# Altium PCB rys_PCB.PcbDoc
Units mm, origin at the board's own origin, x right, y up, seen from the top; angles counter-clockwise.
Board outline 56.3 x 64 mm, 2 copper layers (Top Layer, Bottom Layer); 61 components, 55 nets, 277 pads, 97 vias.
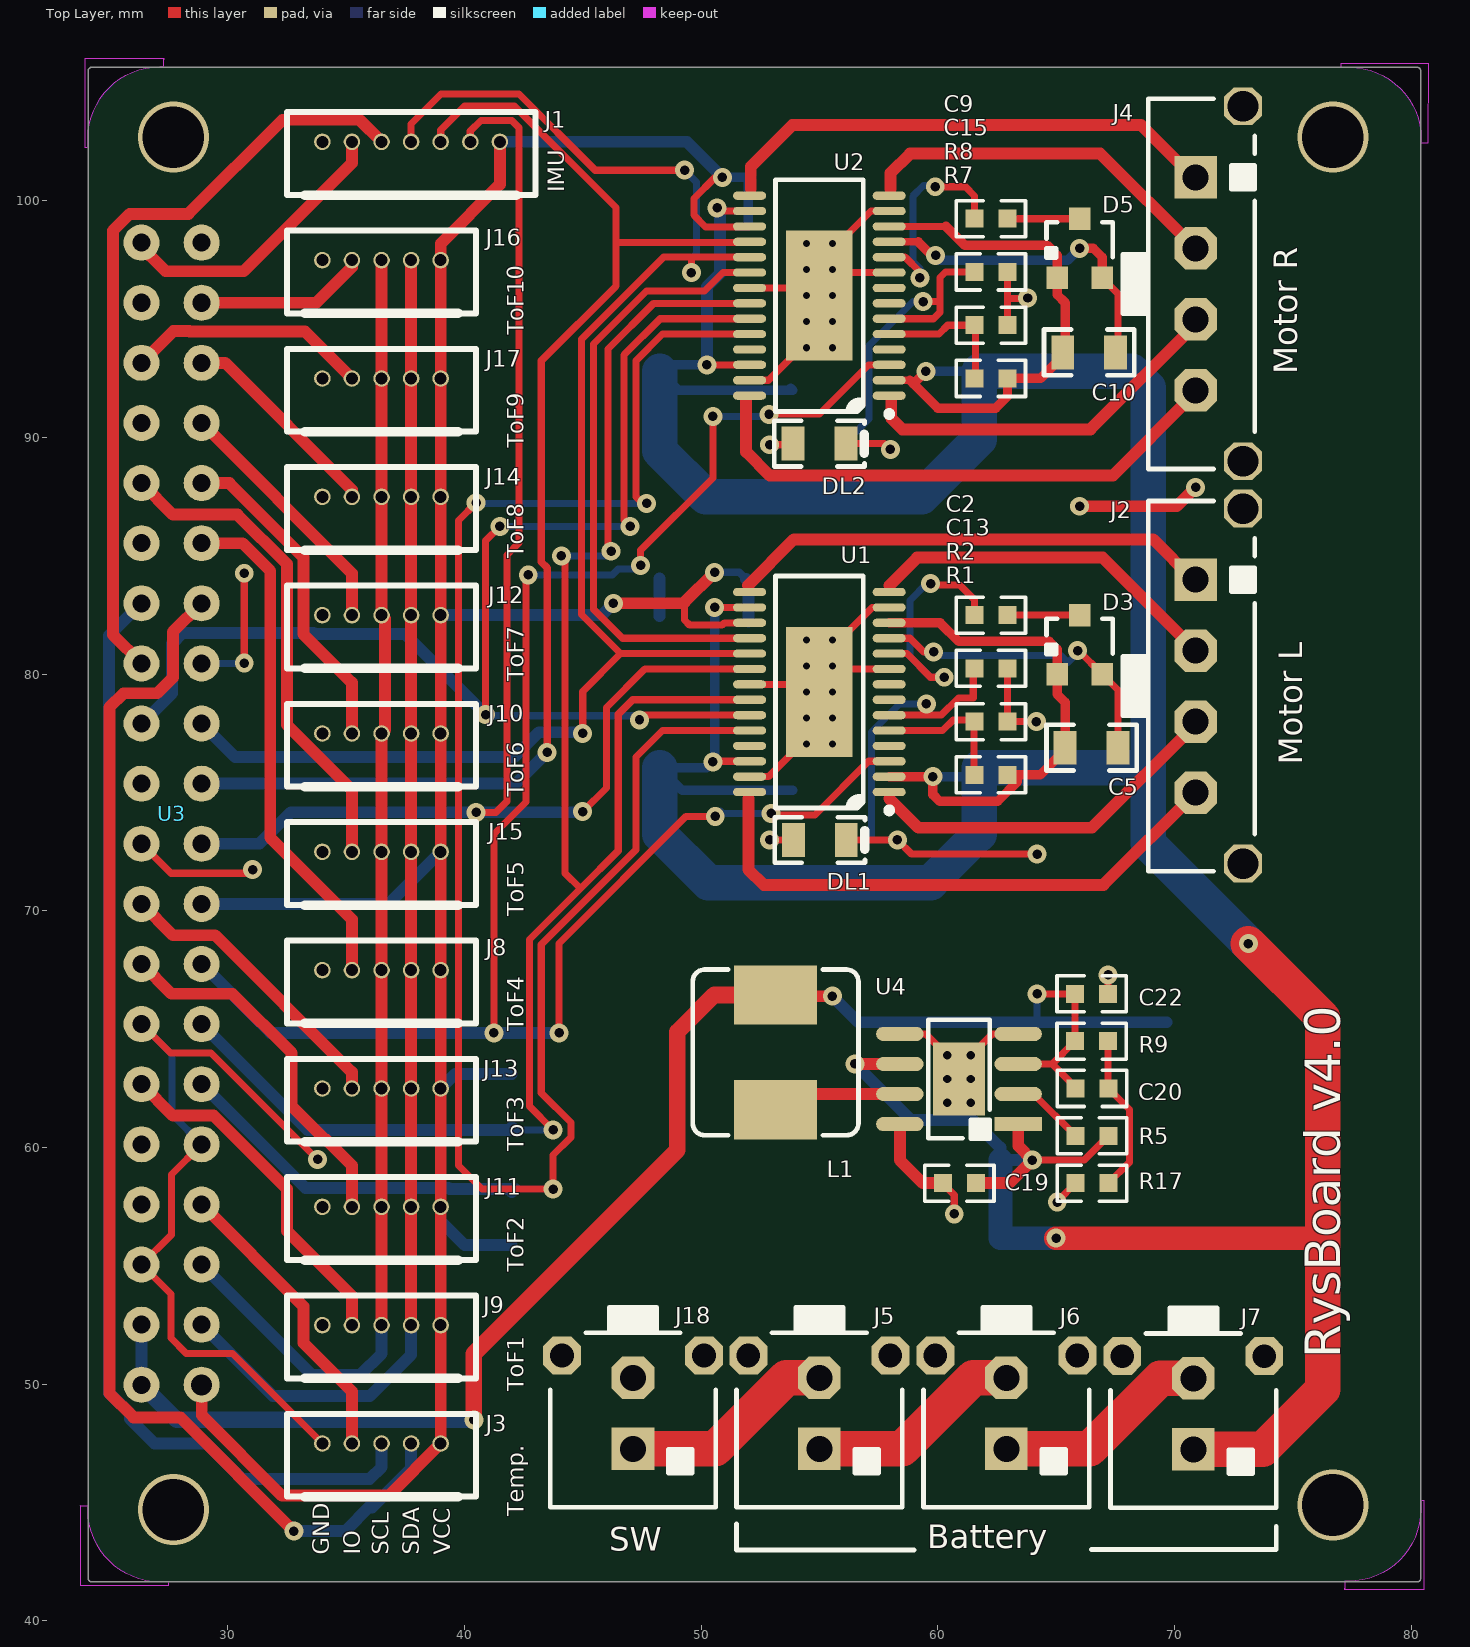
[diagram p0: Top Layer view]
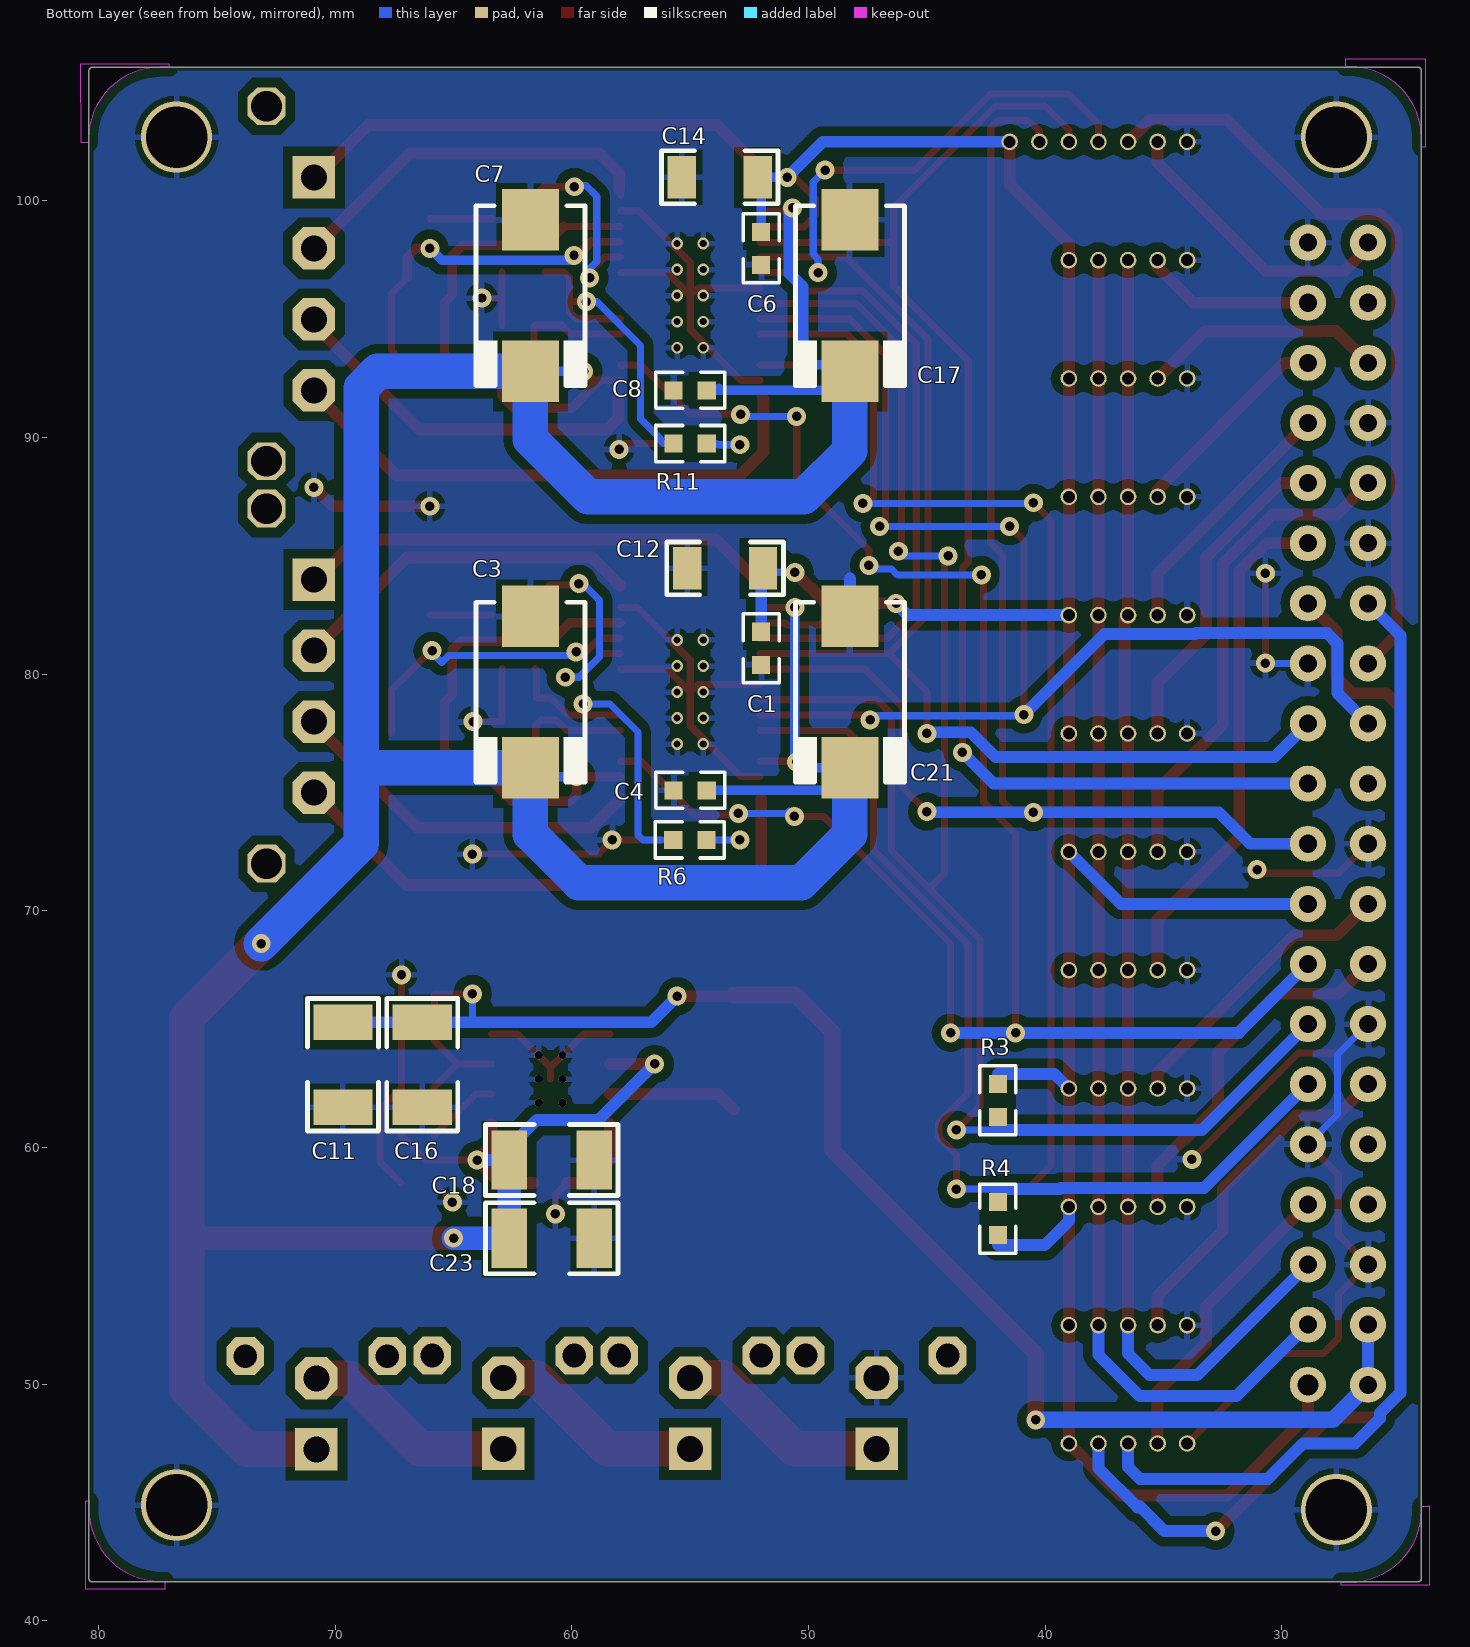
[diagram p1: Bottom Layer view, seen from below]

## Layer stack, top to bottom
Top Solder: solder mask 0.0102, Solder Resist, Dk 3.5
Top Layer: signal copper 0.0356
Dielectric 1: dielectric 0.32, FR-4, Dk 4.8
Bottom Layer: signal copper 0.0356
Bottom Solder: solder mask 0.0102, Solder Resist, Dk 3.5

## Board outline
24.257,41.65 cw(c24.257,41.8) 24.107,41.8 24.107,105.5 cw(c24.257,105.5) 24.257,105.65 80.257,105.65 cw(c80.257,105.5) 80.407,105.5 80.407,41.8 cw(c80.257,41.8) 80.228,41.652 80.229,41.652 cw(c80.2,41.8) 80.2,41.65
cut-out: 77.2,41.675 77.2,41.375 cw(c77.175,41.375) 77.175,41.35 80.55,41.35 80.55,45.075 80.4,45.075 80.4,44.7 cw(c77.375,44.7) 77.375,41.675
cut-out: 24.1,44.85 23.8,44.85 cw(c23.8,44.875) 23.775,44.875 23.775,41.5 27.5,41.5 27.5,41.65 27.125,41.65 cw(c27.125,44.675) 24.1,44.675
cut-out: 27.3,105.675 27.3,105.975 cw(c27.325,105.975) 27.325,106 23.95,106 23.95,102.275 24.1,102.275 24.1,102.65 cw(c27.125,102.65) 27.125,105.675
cut-out: 80.425,102.45 80.725,102.45 80.75,105.8 77.025,105.8 77.025,105.65 77.4,105.65 cw(c77.4,102.625) 80.425,102.625
cut-out: 80.4,105.65

## Design rules (kind name [scope] priority, off if disabled: settings)
Clearance [All] p1: gap=0.4 ignorepadtopadclearanceinfootprint=FALSE except(0: Arc-Hole Track-Hole SMDPad-Hole THPad-Hole Via-Hole Fill-Hole Poly-Hole Region-Hole Text-Hole; 0.2: Arc-Arc Arc-Track Arc-SMDPad Arc-THPad Arc-Via Arc-Text Track-Track Track-SMDPad Track-THPad Track-Via Track-Text SMDPad-SMDPad SMDPad-THPad SMDPad-Via SMDPad-Text THPad-THPad THPad-Via THPad-Text Via-Via Via-Text)
ComponentClearance [All] p1: gap=0.2 collisioncheckmode=3 verticalgap=0.2 showdistances=FALSE
PlaneClearance [All] p1: clearance=0.8
PolygonConnect [All] p1: connectstyle=Relief reliefconductorwidth=0.254 reliefentries=4 polygonreliefangle="90 Angle" airgapwidth=0.254
RoutingCorners [All] p1: cornerstyle=45-Degree minsetback=2 maxsetback=2
RoutingVias [All] p1: holewidth=0.4 width=0.8 viastyle="Through Hole" minholewidth=0.4 minwidth=0.7 maxholewidth=1 maxwidth=5
SolderMaskExpansion [All] p1: expansion=0.05
Width [All] p1: maxlimit=2 minlimit=0.3 preferedwidth=0.5
27 further rules are at their usual default settings.

## Components (designator, comment, footprint, x,y, rotation, side; value= is the part's Value field where it differs from the comment)
C1 "100n" 0603 52,81.1 r90 bottom
C2 "10n" 0603 62.25,82.5 r180 top
C3 "47u" _C_TAN_D 61.75,79.248 r90 bottom
C4 "100n" 0603 55,75.1 r0 bottom
C5 "220n" 0805 66.5,76.9 r180 top
C6 "100n" 0603 52,98 r90 bottom
C7 "47u" _C_TAN_D 61.75,96 r90 bottom
C8 "100n" 0603 55,92 r0 bottom
C9 "10n" 0603 62.25,99.25 r180 top
C10 "220n" 0805 66.4,93.6 r180 top
C11 "10u" 1210_C 69.675,63.5 r90 bottom
C12 "10u" 1206_C 53.525,84.475 r180 bottom
C13 "100n" 0603 62.25,80.25 r0 top
C14 "10u" 1206_C 53.75,101 r180 bottom
C15 "100n" 0603 62.25,97 r0 top
C16 "10u" 1210_C 66.325,63.5 r90 bottom
C17 "47u" _C_TAN_D 48.25,96 r90 bottom
C18 "10u" 1210_C 60.85,59.475 r0 bottom
C19 "100n" 0603 60.918,58.5 r0 top
C20 "10n" 0603 66.518,62.5 r180 top
C21 "47u" _C_TAN_D 48.25,79.25 r90 bottom
C22 "100n" 0603 66.5,66.5 r180 top
C23 "10u" 1210_C 60.85,56.175 r0 bottom
D3 "BAV99" SOT-23 66,81.25 r0 top
D5 "BAV99" SOT-23 66,98 r0 top
DL1 "RED" 0805_LED 55.018,73 r180 top
DL2 "RED" 0805_LED 55,89.75 r180 top
J1 "PICO_BLADE_7" PicoBlade_THT_1x7_HEADER 36.5,102.5 r0 top
J2 "Molex Microfit" "MICROFIT 4x1 Vertical" 73.4,80 r90 top
J3 "PICO_BLADE_5" PicoBlade_THT_1x5_HEADER 36.5,47.5 r0 top
J4 "Molex Microfit" "MICROFIT 4x1 Vertical" 73.4,97 r90 top
J5 "Molex Microfit" "MICROFIT 1x2 Vertical" 55,50.275 r0 top
J6 "Molex Microfit" "MICROFIT 1x2 Vertical" 62.9,50.275 r0 top
J7 "Molex Microfit" "MICROFIT 1x2 Vertical" 70.8,50.25 r0 top
J8 "PICO_BLADE_5" PicoBlade_THT_1x5_HEADER 36.5,67.5 r0 top
J9 "PICO_BLADE_5" PicoBlade_THT_1x5_HEADER 36.5,52.5 r0 top
J10 "PICO_BLADE_5" PicoBlade_THT_1x5_HEADER 36.5,77.5 r0 top
J11 "PICO_BLADE_5" PicoBlade_THT_1x5_HEADER 36.5,57.5 r0 top
J12 "PICO_BLADE_5" PicoBlade_THT_1x5_HEADER 36.5,82.5 r0 top
J13 "PICO_BLADE_5" PicoBlade_THT_1x5_HEADER 36.5,62.5 r0 top
J14 "PICO_BLADE_5" PicoBlade_THT_1x5_HEADER 36.5,87.5 r0 top
J15 "PICO_BLADE_5" PicoBlade_THT_1x5_HEADER 36.5,72.5 r0 top
J16 "PICO_BLADE_5" PicoBlade_THT_1x5_HEADER 36.5,97.5 r0 top
J17 "PICO_BLADE_5" PicoBlade_THT_1x5_HEADER 36.5,92.5 r0 top
J18 "Molex Microfit" "MICROFIT 1x2 Vertical" 47.125,50.275 r0 top
L1 "3.3uH" L_HPI0624 53.15,64.025 r0 top
R1 "62k1%" 0603_R 62.25,75.75 r0 top
R2 "9.76k" 0603_R 62.25,78 r180 top
R3 "10k" 0603_R 42,62 r90 bottom
R4 "10k" 0603_R 42,57 r270 bottom
R5 "1k" 0603_R 66.518,60.5 r0 top
R6 "3k" 0603_R 55.018,73 r0 bottom
R7 "62k1%" 0603_R 62.25,92.5 r0 top
R8 "9.76k" 0603_R 62.25,94.75 r180 top
R9 "11k1%" 0603_R 66.5,64.5 r180 top
R11 "3k" 0603_R 55,89.75 r0 bottom
R17 "2k1%" 0603_R 66.518,58.5 r0 top
U1 "ST L6470 28Pin" "ST HTSSOP-28" 55,79.25 r180 top
U2 "ST L6470 28Pin" "ST HTSSOP-28" 55,96 r180 top
U3 "RaspberryPi_3B+" RASPBERRYPI_S 26.36,98.24 r270 top locked
U4 "ST1S10PHR" HSOP8 60.9,62.9 r180 top

## Footprints (in the part's own frame and the unit in brackets; to place one, negate y for a bottom-side part, rotate by r counter-clockwise, add the part's x,y. Pads: shape width x height; smd on the part's side, far side on the other; paste and mask are expansions set on the pad)
0603 [mil]
  rect 30x30 smd: 1(-27.5,0) 2(27.5,0)
  silkscreen extent -58,-30 58,30, body extent -31,-16 31,16, height 31
0603_R [mil]
  rect 30x30 smd: 1(-27.5,0) 2(27.5,0)
  silkscreen extent -58,-30 58,30, body extent -31,-16 31,16, height 31
0805 [mil]
  rect 38x56 smd: 1(-44,0) 2(44,0)
  silkscreen extent -75,-38 75,38, body extent -39,-25 39,25, height 39
0805_LED [mm]
  rect 0.965x1.422 smd: A(1.118,0) K(-1.118,0)
  silkscreen extent -1.91,-0.97 1.91,0.97, body extent -1,-0.63 1,0.63, height 0.9
1206_C [mm]
  rect 1.2x1.8 smd: 1(-1.6,0) 2(1.6,0)
  silkscreen extent -2.46,-1.12 2.46,1.12, body extent -1.6,-0.8 1.6,0.8, height 0.8
1210_C [mm]
  rect 1.5x2.5 smd: 1(-1.8,0) 2(1.8,0)
  silkscreen extent -2.8,-1.5 2.8,1.5, body extent -2.1,-1.25 2.1,1.25, height 2
_C_TAN_D [mm] "Capacitor, SM Tantalum; Body 7.3 x 4.3 mm (LxW typ)"
  rect 2.6x2.4 smd: N(3.2,0) P(-3.2,0)
  silkscreen extent -3.8,-2.3 3.8,2.3, body extent -3.65,-2.15 3.65,2.15, height 2.8
HSOP8 [mm] "H pad 8-Pin Small Outline Integrated Circuit 1.27 mm Pitch, IPC Medium Density"
  rect 2x0.6 smd: 1(-2.5,1.905)
  oval 2x0.6 smd: 2(-2.5,0.635) 3(-2.5,-0.635) 4(-2.5,-1.905) 5(2.5,-1.905) 6(2.5,-0.635) 7(2.5,0.635) 8(2.5,1.905)
  rect 2.2x3.1 smd: 9(0,0)
  silkscreen extent -1.3,-2.5 1.3,2.53, body extent -3.1,-2.5 3.1,2.5, height 1.75
L_HPI0624 [mm] "7.3mm x 7.3mm x 3.2mm"
  rect 3.5x2.5 smd: 1(0,2.425) 2(0,-2.425)
  silkscreen extent -3.5,-3.5 3.5,3.5, body extent -3.65,-3.65 3.65,3.65, height 3.2
"MICROFIT 1x2 Vertical" [mm] "Molex Vertical 3.00mm pitch Micro-Fit 3.0 Wire-to-Board Header 430450212"
  rect 1.8x1.8 hole 1.1: 1(0,-3)
  oct 1.8x1.8 hole 1.1: 2(0,0)
  oct 1.6x1.6 hole 1: MH(-3,0.94) MH(3,0.94)
  silkscreen extent -3.5,-5.47 3.5,2.98, body extent -3.57,-5.47 3.58,3.3, height 9.95
"MICROFIT 4x1 Vertical" [mm] "Molex Vertical 3.00mm pitch Micro-Fit 3.0 Wire-to-Board Header 436500429"
  rect 1.8x1.8 hole 1.1: 1(4,2.5)
  oct 1.8x1.8 hole 1.1: 2(1,2.5) 3(-2,2.5) 4(-5,2.5)
  oct 1.6x1.6 hole 1.3: MH(-8,0.5) MH(7,0.5)
  silkscreen extent -8.32,0 7.32,5.58, body extent -8.32,0.1 7.32,5.7, height 9.95
PicoBlade_THT_1x5_HEADER [mm]
  round 0.7 hole 0.51: 0(-2.5,0) 1(-1.25,0) 2(0,0) 3(1.25,0) 4(2.5,0)
  silkscreen extent -4,-2.25 4,1.25, body extent -4,-2.25 4,1.25, height 4.25
PicoBlade_THT_1x7_HEADER [mm]
  round 0.7 hole 0.51: 0(-2.5,0) 1(-1.25,0) 2(0,0) 3(1.25,0) 4(2.5,0) 5(3.75,0) 6(5,0)
  silkscreen extent -4,-2.25 6.5,1.25, body extent -3.95,-2.2 6.55,1.3, height 4.2
RASPBERRYPI_S [mil] "singleboard_computer_40PIN_header"
  round 60 hole 35: 1(1900,100)
  round 60 hole 30: 2(1900,0) 3(1800,100) 4(1800,0) 5(1700,100) 6(1700,0) 7(1600,100) 8(1600,0) 9(1500,100) 10(1500,0) 11(1400,100) 12(1400,0) 13(1300,100) 14(1300,0) 15(1200,100) 16(1200,0) 17(1100,100) 18(1100,0) 19(1000,100) 20(1000,0) 21(900,100) 22(900,0) 23(800,100) 24(800,0) 25(700,100) 26(700,0) 27(600,100) 28(600,0) 29(500,100) 30(500,0) 31(400,100) 32(400,0) 33(300,100) 34(300,0) 35(200,100) 36(200,0) 37(100,100) 38(100,0) 39(0,100) 40(0,0)
  body extent -1266,-71 2168,2322, height 93
SOT-23 [mm] "SOT-23; 3 Leads; Body 3.0 x 2.6 mm, inc. leads (LxW max)"
  rect 0.9x0.95 smd: 1(-0.95,-1.25) 2(0.95,-1.25) 3(0,1.25)
  silkscreen extent -1.4,-0.4 1.4,1.1, body extent -1.45,-1.25 1.45,1.25, height 1
"ST HTSSOP-28" [mm] "HTSSOP, 28-Leads, Body 9.70x4.40mm, Pitch 0.65mm, Thermal Pad 5.50x2.80mm, IPC Medium Density"
  oval 1.4x0.35 smd: 1(-2.95,4.225) 2(-2.95,3.575) 3(-2.95,2.925) 4(-2.95,2.275) 5(-2.95,1.625) 6(-2.95,0.975) 7(-2.95,0.325) 8(-2.95,-0.325) 9(-2.95,-0.975) 10(-2.95,-1.625) 11(-2.95,-2.275) 12(-2.95,-2.925) 13(-2.95,-3.575) 14(-2.95,-4.225) 15(2.95,-4.225) 16(2.95,-3.575) 17(2.95,-2.925) 18(2.95,-2.275) 19(2.95,-1.625) 20(2.95,-0.975) 21(2.95,-0.325) 22(2.95,0.325) 23(2.95,0.975) 24(2.95,1.625) 25(2.95,2.275) 26(2.95,2.925) 27(2.95,3.575) 28(2.95,4.225)
  rect 2.8x5.5 smd: 29(0,0)
  silkscreen extent -3.08,-4.9 1.85,5.12, body extent -2.25,-4.9 2.25,4.9, height 1.2

## Part data
C1 C2 C4 C5 C6 C8 C9 C10 C11 C12 C13 C14 C15 C16 C18 C19 C20 C22 C23: library part C_CER, "Ceramic Capacitor"
C3 C7 C17 C21: library part C_TAN, "Tantalum Capacitor"
D3 D5: "Charge pump diode", ComponentLink1Description=Supplier, ComponentLink1URL=https://www.tme.eu/pl/details/bav99-dio/diody-uniwersalne-smd/diotec-semiconductor/bav99/?gclid=CjwKCAjwuO3cBRAyEiwAzOxKsjEfIjBEMiuf1MfOOw41XfFBLf9W3FTm4SrcCEQFmDl5D7iYJBHTpRoCdegQAvD_BwE
DL1 DL2: library part LED1, "Light Emitting Diode"
J1: "1x7 header", URL=https://www.tme.eu/pl/details/mx-53047-0510/zlacza-sygnalowe-raster-125mm/molex/530470510/
J2 J4: library part "Microfit 1x4", Supplier=TME, Symbol="Molex 436500429", URL=https://www.tme.eu/pl/details/mx-43650-0429/zlacza-sygnalowe-raster-300mm/molex/43650-0429/
J3 J8 J9 J10 J11 J12 J13 J14 J15 J16 J17: "1x5 header", URL=https://www.tme.eu/pl/details/mx-53047-0510/zlacza-sygnalowe-raster-125mm/molex/530470510/
J5 J6 J7 J18: library part "Microfit 2x1", Supplier=TME, Symbol="Molex 430450212"
L1: library part L_IND_HPI0624-3R3, "Inductor", Supplier=TME, Symbol=HPI0624-3R3, URL=https://www.tme.eu/pl/details/hpi0624-3r3/dlawiki-smd-mocy/ferrocore/
R1 R2 R3 R4 R5 R6 R7 R8 R9 R11 R17: library part R, "Resistor"
U1 U2: "SPI stepper driver"
U4: "DC/DC converter 3A", Supplier=TME, URL=https://www.tme.eu/pl/details/st1s14phr/regulatory-napiecia-uklady-dcdc/st-microelectronics/

## Via types
v1: diameter 0.8, hole 0.4, Top Layer to Bottom Layer, tented both sides, 67 vias
v2: diameter 0.5, hole 0.3, Top Layer to Bottom Layer, 20 vias
v3: diameter 0.35, hole 0.35, Top Layer to Bottom Layer, 6 vias
v4: diameter 3, hole 2.6, Top Layer to Bottom Layer, 4 vias

## Nets (pads, with @x,y where several pads share a name; then routed paths per layer and width w, separated by ;. In a path a pad name is that pad's centre, name@x,y a point inside that pad or via, vN(x,y) a via of type N, cw(c..) or ccw(c..) an arc to the next point about the centre after c; other vN are vias at no path point)
3V3: C1.2 C6.2 C12.2 C14.2 J1.6 J3.4 J8.4 J9.4 J10.4 J11.4 J12.4 J13.4 J14.4 J15.4 J16.4 J17.4 R3.2 R4.2 U1.17 U2.17 U3.1 U3.17 | length 125.3
  Top Layer w0.3: 49.3,83.036 49.3,82.3 49.525,82.075 50.886,82.075 50.986,82.175 U1.17 ; v1(50.9,101) 50.6,101 49.7,100.1 49.7,99.4 50.195,98.905 52.03,98.905 U2.17
  Top Layer w0.5: U3.1 28.9,48.69 32.29,45.3 36.8,45.3 J3.4 J9.4 J11.4 J13.4 J8.4 J15.4 J10.4 J12.4 J14.4 J17.4 J16.4 39,98.2 41.5,100.7 J1.6 ; v1(46.3,83) 49.264,83 49.3,83.036 v1(50.575,84.311)
  Bottom Layer w0.3: v1(50.575,84.311) 51.614,84.311 C12.2@51.9,84.025
  Bottom Layer w0.4: v1(50.9,101) C14.2@51.9,101 ; 52,99.118 52,100.9 C14.2@51.9,101 ; C14.2 C14.2@51.9,101
  Bottom Layer w0.5: U3.17 36.8,70.3 J15.4 ; J11.4 39,56.9 40.018,55.882 42,55.882 ; J13.4 39.618,63.118 42,63.118 ; J12.4 45.8,82.5 v1(46.3,83) ; J1.6 49.4,102.5 v1(50.9,101) ; C12.2@51.9,84.025 52,83.925 52,82.218
5V: C11.2 C16.2 C20.2 C22.2 L1.1 R9.2 U3.2 U3.4 U4.3 | length 68
  Top Layer w0.3: U4.3 64.836,63.535 ; v1(64.2,66.5) C22.2 R9.2 64.836,63.535 ; C20.2 65.82,62.552 64.836,63.535
  Top Layer w0.5: L1.1 53.2,66.4 v1(55.55,66.4)
  Top Layer w0.7: v1(40.4,48.5) 40.4,51.3 49,59.9 49,64.897 50.553,66.45 L1.1
  Bottom Layer w0.3: 64.2,65.3 v1(64.2,66.5)
  Bottom Layer w0.5: U3.2 U3.4 ; v1(55.55,66.4) 56.65,65.3 64.2,65.3 C16.2 C11.2
  Bottom Layer w0.7: U3.2 27.84,48.5 v1(40.4,48.5)
BUSY: R3.1 U1.22 U2.22 U3.13 | length 74.2
  Top Layer w0.3: v1(43.75,60.75) 42.75,61.75 42.75,68.793 44.9,70.943 ; v1(44.1,85) 44.25,84.85 44.25,71.593 44.9,70.943 ; v1(46.2,85.2) 46.075,85.325 46.075,93.75 48,95.675 U2.22 ; U1.22 47.114,78.925 46.5,78.311 46.5,72.543 44.9,70.943
  Bottom Layer w0.3: 42.132,60.75 v1(43.75,60.75) ; v1(44.1,85) 46,85 v1(46.2,85.2)
  Bottom Layer w0.5: U3.13 33.37,60.75 42.132,60.75 42,60.882
CE0: U1.23 U2.23 U3.24 | length 57.2
  Top Layer w0.3: v1(40.9,78.3) 40.9,85.65 v1(41.5,86.25) ; v1(47,86.25) 46.75,86.5 46.75,93.5 48.275,95.025 U2.23 ; v1(47.4,78.075) 47.6,78.275 U1.23
  Bottom Layer w0.3: v1(40.9,78.3) v1@40.9,78.25 ; v1(41.5,86.25) v1(47,86.25) ; v1(47.4,78.075) 47.225,78.25 v1@40.9,78.25 ; v1@40.9,78.25 40.85,78.25 40.875,78.275 v1@40.9,78.25
  Bottom Layer w0.5: U3.24 26.37,77.92 27.65,79.2 27.65,81.3 28.1,81.75 33.619,81.75 33.669,81.7 37.5,81.7 v1(40.9,78.3)
CE1: J1.2 U3.26 | length 32.5
  Top Layer w0.5: U3.26 25.148,81.672 25.148,98.742 25.858,99.452 28.342,99.452 32.321,103.431 35.569,103.431 J1.2
FLAG: R4.1 U1.24 U2.24 U3.11 | length 94.4
  Top Layer w0.3: v1(40.5,87.25) 39.75,86.5 39.75,59.25 40.75,58.25 v1(43.75,58.25) 43.75,59.689 44.5,60.439 44.5,61.061 43.25,62.311 43.25,68.586 47.25,72.586 47.25,76.5 48.375,77.625 U1.24 ; v1(47.7,87.225) 47.525,87.225 47.25,87.5 47.25,93.25 48.375,94.375 U2.24
  Bottom Layer w0.3: v1(40.5,87.25) 40.525,87.225 v1(47.7,87.225) ; 42.132,58.25 v1(43.75,58.25)
  Bottom Layer w0.5: U3.11 33.28,58.3 39.331,58.3 39.381,58.25 42.132,58.25 42,58.118
GND: C1.1 C3.N C4.2 C6.1 C7.N C8.2 C11.1 C12.1 C13.2 C14.1 C15.2 C16.1 C17.N C18.1 C19.1 C21.N C22.1 C23.1 DL1.K DL2.K J1.0 J3.0 J8.0 J9.0 J10.0 J11.0 J12.0 J13.0 J14.0 J15.0 J16.0 J17.0 J18.2 R2.1 R8.1 R17.1 U1.9 U1.13 U1.21 U1.27 U1.29 U2.9 U2.13 U2.21 U2.27 U2.29 U3.6 U3.9 U3.14 U3.20 U3.25 U3.30 U3.34 U3.39 U4.4 U4.5 U4.8 U4.9 | length 116.6
  Top Layer w0.3: U3.14 27.58,64 29.3,64 v1(33.8,59.5) ; U3.20 27.607,71.593 30.893,71.593 v1(31.05,71.75) ; U3.9 27.62,58.86 27.62,56.32 U3.6 27.6,53.82 27.6,51.95 28.25,51.3 30.2,51.3 J3.0 ; v1(30.7,80.477) v1(30.7,84.27) ; U1.27 52.85,75.675 55,77.825 U1.29 ; U1.21 54.675,79.575 U1.29 ; U2.27 52.85,92.425 55,94.575 U2.29 ; U2.21 54.675,96.325 U2.29 ; DL2.K 57.75,89.75 v1(58,89.5) ; DL1.K v1(58.3,73) 58.9,72.4 v1(64.2,72.4) ; U1.9 55.975,80.225 U1.29 ; U1.13 57.231,82.825 55,80.594 U1.29 ; U2.9 55.975,96.975 U2.29 ; U2.13 57.175,99.575 55,97.4 U2.29 ; U4.5 59.495,64.805 v3(60.4,63.9) U4.9@60.9,63.4 ; C19.1 60.219,58.481 60.7,58 v1(60.7,57.2) ; U4.9 U4.9@60.9,63.4 ; C13.2 R2.1 v1(64.171,78) ; R8.1 62.948,95.875 ; C15.2 62.948,95.875 ; U4.4 62.305,64.805 v3(61.4,63.9) U4.9@60.9,63.4 ; v1(63.8,95.9) 63.775,95.875 62.948,95.875 ; v1(65.05,57.7) 65.05,57.73 R17.1 ; C22.1 v1(67.198,67.3)
  Top Layer w0.5: U4.8 58.4,59.475 59.375,58.5 C19.1 ; v1(66,87.1) 70.1,87.1 v1(70.9,87.9)
  Bottom Layer w0.3: U3.14 27.644,63.936 27.644,61.396 U3.9 ; U3.25 30.683,80.46 v1(30.7,80.477) ; v1@58,89.4 v1(58,89.5) ; v1@65.734,87.1 v1(66,87.1)
  Bottom Layer w0.5: C21.N 48.25,84.05
  other v2: 54.45,77.05 55.55,77.05 54.45,78.15 55.55,78.15 54.45,79.25 55.55,79.25 54.45,80.35 55.55,80.35 54.45,81.45 55.55,81.45 54.45,93.8 55.55,93.8 54.45,94.9 55.55,94.9 54.45,96 55.55,96 54.45,97.1 55.55,97.1 54.45,98.2 55.55,98.2
  other v3: 60.4,61.9 61.4,61.9 60.4,62.9 61.4,62.9
  other v4: 27.7,44.7 76.7,44.9 27.7,102.7 76.7,102.7
IRQ: J1.1 U3.40 | length 13.4
  Top Layer w0.5: J1.1 35.25,101.6 30.678,97.028 27.372,97.028 26.16,98.24 U3.40 U3.40@26.4,98.24 ; U3.40@26.4,98.24 26.4,98.132 26.7,98.132 26.592,98.24 U3.40@26.4,98.24
MISO: J1.4 U2.18 U3.21 | length 55.3
  Top Layer w0.3: J1.4 39,103 40.014,104.014 42.107,104.014 46.4,99.721 46.4,98.275 ; v1(43.5,76.7) 43.5,83.439 43.5,84.5 43.25,84.75 43.25,93.25 46.4,96.4 46.4,98.275 ; U2.18 52.025,98.25 46.425,98.25 46.4,98.275
  Bottom Layer w0.5: U3.21 42.18,75.38 v1(43.5,76.7)
MOSI: J1.5 U1.20 U3.19 | length 61.2
  Top Layer w0.3: J1.5 40.25,102.95 40.7,103.4 42,103.4 42.3,103.1 42.3,85.543 41.8,85.043 41.8,74.636 41.332,74.168 v1(40.5,74.168) ; v1(45,74.2) 46,75.2 46,78.6 47.625,80.225 U1.20
  Bottom Layer w0.5: U3.19 31.34,72.84 32.668,74.168 v1(40.5,74.168) 44.968,74.168 v1(45,74.2)
NetC2_1: C2.1 D3.3 | length 2.6
  Top Layer w0.3: 63.368,82.5 D3.3
NetC2_2: C2.2 U1.10 | length 10.9
  Top Layer w0.3: U1.10 58.7,80.875 59.7,79.875 v1(60.275,79.875) ; v1(59.703,83.829) 59.75,83.782 60.918,83.782 61.55,83.15 C2.2@61.55,82.5
  Bottom Layer w0.3: v1(59.703,83.829) 59.571,83.829 59.55,83.85 58.825,83.125 58.825,80.75 59.7,79.875 v1(60.275,79.875)
NetC9_1: C9.1 D5.3 | length 2.6
  Top Layer w0.3: 63.368,99.25 D5.3
NetC9_2: C9.2 U2.10 | length 9.3
  Top Layer w0.3: U2.10 58.625,97.625 59.25,97 v1(59.25,96.75) ; v1(59.897,100.6) 61.168,100.6 61.551,100.217 C9.2
  Bottom Layer w0.3: v1(59.25,96.75) 59.25,97.137 58.948,97.439 58.948,100.197 59.401,100.65 59.725,100.65 59.753,100.678 59.831,100.6 v1(59.897,100.6)
NetC13_1: C13.1 R6.2 U1.6 | length 13.9
  Top Layer w0.3: U1.6 59.3,78.275 ; v1(59.525,78.75) 59.525,78.5 59.3,78.275 ; C13.1 61.5,80.198 61.5,79 60.875,79 60.15,78.275 59.3,78.275
  Bottom Layer w0.3: 56.218,73 56.968,73 ; 57,73 57.2,73.2 57.2,77.558 58.392,78.75 v1(59.525,78.75)
NetC15_1: C15.1 R11.2 U2.6 | length 13.2
  Top Layer w0.3: U2.6 59.825,95.025 60.1,95.3 60.1,95.75 ; v1(59.386,95.75) 60.1,95.75 ; 61.132,97 60.329,97 60.1,96.771 60.1,95.75
  Bottom Layer w0.3: 56.118,89.75 56.25,89.882 56.25,89.95 57.1,90.8 57.1,93.9 58.95,95.75 v1(59.386,95.75)
NetC20_1: C20.1 R9.1 R17.2 | length 6.7
  Top Layer w0.3: R9.1 67.198,62.518 C20.1 68.1,61.617 68.1,59.383 R17.2
NetDL1_A: DL1.A R6.1 | length 2
  Top Layer w0.3: v1(52.9,73) DL1.A
  Bottom Layer w0.3: v1(52.9,73) 53.9,73
NetDL2_A: DL2.A R11.1 | length 2
  Top Layer w0.3: v1(52.9,89.7) 53.832,89.7 DL2.A
  Bottom Layer w0.3: v1(52.9,89.7) 53.832,89.7 53.882,89.75
NetJ2_1: J2.1 U1.15 | length 20.7
  Top Layer w0.3: 51.975,83.75 52.05,83.675 U1.15
  Top Layer w0.5: 51.975,83.75 53.925,85.7 69.1,85.7 70.8,84 J2.1
NetJ2_2: J2.2 U1.14 | length 15.1
  Top Layer w0.5: 57.95,83.75 59.129,84.929 66.971,84.929 J2.2
NetJ2_3: J2.3 U1.1 | length 15.4
  Top Layer w0.5: 57.95,74.75 59.182,73.518 66.518,73.518 J2.3@71,78
NetJ2_4: J2.4 U1.28 | length 24.1
  Top Layer w0.3: 52,74.74 52,74.975 U1.28
  Top Layer w0.5: 52,74.74 52,71.75 52.65,71.1 54.444,71.1 ; 54.444,71.1 55.356,71.1 67,71.1 J2.4
NetJ4_1: J4.1 U2.15 | length 21.7
  Top Layer w0.3: U2.15 52.05,100.45 52.1,100.5
  Top Layer w0.5: 52.1,100.5 52.1,101.45 53.855,103.205 68.595,103.205 70.8,101 J4.1
NetJ4_2: J4.2 U2.14 | length 15.9
  Top Layer w0.3: U2.14 57.95,100.45 58,100.5
  Top Layer w0.5: 58,100.5 58,101.175 58.83,102.005 66.87,102.005 70.875,98 J4.2
NetJ4_3: J4.3 U2.1 | length 16.1
  Top Layer w0.3: U2.1 U2.1@58.037,91.688
  Top Layer w0.5: U2.1@58.037,91.688 58.037,90.813 58.5,90.35 66.451,90.35 70.9,94.799 J4.3
NetJ4_4: J4.4 U2.28 | length 23.3
  Top Layer w0.3: U2.28@51.9,91.625 U2.28
  Top Layer w0.5: U2.28@51.9,91.625 51.9,89.4 52.9,88.4 67.4,88.4 70.7,91.7 J4.4@70.7,92
NetJ5_1: J5.1 J6.2 | length 9.1
  Top Layer w1.5: J5.1 58.503,47.275 61.503,50.275 J6.2
NetJ5_2: J5.2 J18.1 | length 9.1
  Top Layer w1.5: J18.1 50.603,47.275 53.603,50.275 J5.2
NetJ6_1: J6.1 J7.2 | length 9.1
  Top Layer w1.5: J6.1 66.428,47.275 69.403,50.25 J7.2
NetL1_2: L1.2 U4.7 | length 5.5
  Top Layer w0.5: L1.2 53.815,62.265 U4.7
NetR1_1: R1.1 R2.2 U1.5 | length 6
  Top Layer w0.3: U1.5 60.207,77.625 60.657,78.075 61.3,78.075 61.525,77.85 R1.1@61.525,75.75
NetR5_1: R5.1 U4.2 | length 3.2
  Top Layer w0.3: U4.2 64.055,62.265 R5.1
NetR7_1: R7.1 R8.2 U2.5 | length 6
  Top Layer w0.3: U2.5 60.05,94.375 60.425,94.75 R8.2 61.6,94.701 R7.1@61.6,92.5
OD\: J3.1 U3.7 | length 12.7
  Top Layer w0.5: U3.7 33.2,53.3 33.2,51.75 35.25,49.7 J3.1
SCL: J8.2 J9.2 J10.2 J11.2 J12.2 J13.2 J14.2 J15.2 J16.2 J17.2 U3.5 | length 56.2
  Top Layer w0.5: J9.2 J11.2 J13.2 J8.2 J15.2 J10.2 36.65,77.65 36.65,82.35 J12.2 J14.2 J17.2 J16.2
  Bottom Layer w0.5: U3.5 33.56,50.4 35.6,50.4 36.5,51.3 J9.2
SCL1: J3.2 U3.28 | length 48.3
  Bottom Layer w0.5: U3.28 26.35,83 24.991,81.641 24.991,49.635 25.858,48.768 25.858,48.542 26.9,47.5 29.1,47.5 30.6,46 36,46 36.5,46.5 J3.2
SCLK: J1.3 U1.19 U2.19 U3.23 | length 68.2
  Top Layer w0.3: J1.3 37.75,103.25 39.014,104.514 42.314,104.514 45.528,101.3 v1@48.965,101.3 ; v1(45,77.5) 45,79.275 46.6,80.875 ; v1(49.593,96.975) 49.593,97.618 49.6,97.625 ; U1.19 46.6,80.875 ; U2.19 49.6,97.625 ; 46.6,80.875 44.95,82.525 44.95,94.157 48.418,97.625 49.6,97.625
  Bottom Layer w0.3: v1(49.302,101.3) 49.8,100.802 49.8,97.755 49.595,97.55 49.593,97.55 v1(49.593,96.975)
  Bottom Layer w0.5: U3.23 30.32,76.5 42.098,76.5 43.148,77.55 44.95,77.55 v1(45,77.5)
SDA: J8.3 J9.3 J10.3 J11.3 J12.3 J13.3 J14.3 J15.3 J16.3 J17.3 U3.3 | length 57.1
  Top Layer w0.5: J9.3 J11.3 J13.3 J8.3 J15.3 J10.3 J12.3 J14.3 J17.3 J16.3
  Bottom Layer w0.5: U3.3 31.92,49.5 36,49.5 37.75,51.25 J9.3
SDA1: J3.3 U3.27 | length 53.2
  Top Layer w0.5: U3.27 27.688,81.788 27.688,79.863 27.025,79.2 25.6,79.2 25.001,78.601 25.001,49.625 26.026,48.6 28,48.6 v1(32.8,43.8)
  Bottom Layer w0.5: v1(32.8,43.8) 34.96,43.8 36.03,44.87 36.1,44.8 37.75,46.45 J3.3
SDI: U1.18 U2.20 | length 26.2
  Top Layer w0.3: U1.18 46.675,81.525 45.45,82.75 45.45,93.95 47.7,96.2 50.152,96.2 50.927,96.975 U2.20
STBY: U1.3 U2.3 U3.15 | length 78.1
  Top Layer w0.3: v1(41.25,64.848) 41.25,73.257 42.6,74.607 v1@42.6,83.925 ; v1(44,64.848) 44,68.629 49.371,74 v1(50.6,74) v1@50.7,74 ; v1(47.45,84.6) 47.45,85.25 50.5,88.3 v1(50.5,90.9) ; v1(52.872,90.984) 52.888,91 55,91 57.075,93.075 U2.3 ; v1(52.963,74.123) 52.901,74.061 54.811,74.061 57.075,76.325 U1.3
  Bottom Layer w0.3: v1(42.7,84.2) 46.249,84.2 46.499,84.45 47.3,84.45 v1(47.45,84.6) ; v1(50.5,90.9) 52.817,90.9 52.825,90.892 52.872,90.939 v1(52.872,90.984) ; v1(50.6,74) 50.825,74.225 50.927,74.123 v1(52.963,74.123)
  Bottom Layer w0.5: U3.15 31.812,64.848 v1(41.25,64.848) v1(44,64.848)
TOF0: J8.1 U3.29 | length 21.7
  Top Layer w0.5: U3.29 30.632,85.54 31.8,84.372 31.8,73.1 35.25,69.65 J8.1
TOF1: J10.1 U3.31 | length 13.9
  Top Layer w0.5: U3.31 30.072,88.08 33.2,84.952 33.2,81.7 35.25,79.65 J10.1
TOF2: J12.1 U3.33 | length 10.8
  Top Layer w0.5: U3.33 35.25,84.27 J12.1
TOF3: J14.1 U3.35 | length 8.9
  Top Layer w0.5: U3.35 29.89,93.16 35.25,87.8 J14.1
TOF4: J16.1 U3.37 | length 7.3
  Top Layer w0.5: U3.37 33.75,95.7 35.25,97.2 J16.1
TOF5: J9.1 U3.12 | length 14.9
  Top Layer w0.5: U3.12 27.688,61.352 29.402,61.352 32.5,58.254 32.5,56.483 35.25,53.733 J9.1
TOF6: J11.1 U3.16 | length 15.5
  Top Layer w0.5: U3.16 27.62,66.5 30.2,66.5 32.7,64 32.7,61.75 34.1,60.35 34.152,60.35 35.25,59.252 J11.1
TOF7: J13.1 U3.18 | length 12.5
  Top Layer w0.5: U3.18 27.688,68.972 29.468,68.972 35.25,63.19 J13.1
TOF8: J15.1 U3.32 | length 20.9
  Top Layer w0.5: U3.32 27.688,86.752 30.41,86.752 32.5,84.662 32.5,77.869 35.25,75.119 J15.1
TOF9: J17.1 U3.36 | length 10.3
  Top Layer w0.5: U3.36 27.7,94.5 28.386,94.5 28.398,94.488 33.262,94.488 J17.1
VBOOT0: C5.1 D3.2 U1.11 | length 13.2
  Top Layer w0.3: U1.11 58.825,81.525 59.4,80.95 v1@59.714,80.95 ; v1(59.825,80.95) v1@59.714,80.95 ; v1@59.91,80.754 v1@59.714,80.95 ; v1(65.908,81) 65.95,81 D3.2 67.618,79.332 C5.1@67.618,77.5
  Bottom Layer w0.3: v1(59.825,80.95) 59.825,80.972 59.999,80.798 65.202,80.798 65.5,80.5 65.908,80.908 v1(65.908,81)
VBOOT1: C10.1 D5.2 U2.11 | length 14.1
  Top Layer w0.3: U2.11 59.173,98.275 ; D5.2 67.618,96.082 67.618,93.7 C10.1
  Top Layer w0.4: 59.173,98.275 59.748,97.7 v1(59.91,97.7) ; v1(66,98) 66.575,98 66.95,97.625 D5.2
  Bottom Layer w0.4: v1(59.91,97.7) 59.91,97.538 59.948,97.5 65.5,97.5 v1(66,98)
VMOT: C3.P C4.1 C5.2 C7.P C8.1 C10.2 C17.P C18.2 C19.2 C21.P C23.2 D3.1 D5.1 J7.1 R1.2 R5.2 R7.2 U1.2 U1.12 U1.16 U1.26 U2.2 U2.12 U2.16 U2.26 U4.1 U4.6 | length 229.5
  Top Layer w0.3: v1(50.25,93.075) U2.26 ; v1@50.525,76.325 U1.26 ; v1(50.575,82.825) U1.16 ; v1@50.775,99.575 U2.16 ; U2.2 58.825,92.425 ; U2.12 60.35,98.925 ; v1(64,59.475) 66.192,59.475 R5.2
  Top Layer w0.4: v1(50.5,76.3) v1@50.525,76.325 ; v1@50.5,82.825 v1(50.575,82.825) ; v1@50.677,99.673 v1@50.775,99.575 ; U1.2 v1(59.8,75.675) 59.8,74.918 60.079,74.639 62.539,74.639 63.368,75.468 63.368,75.75 64.332,75.75 65.382,76.8 65.382,78.818 65.05,79.15 D3.1 65.05,81.05 64.711,81.389 60.886,81.389 60.1,82.175 U1.12 ; 58.825,92.425 58.975,92.275 ; v1(59.5,92.8) 58.975,92.275 ; 60.35,98.925 61.136,98.139 64.611,98.139 65.05,97.7 D5.1 65.05,96.039 65.382,95.707 65.382,93.532 64.35,92.5 R7.2 62.948,91.749 62.45,91.25 60,91.25 58.975,92.275
  Top Layer w0.5: v1@50.677,99.673 v1(50.677,99.705) ; v1@56.481,63.535 v1(56.5,63.535) U4.6 ; C19.2 63.025,58.5 v1(64,59.475) 63.4,60.075 U4.1
  Top Layer w1: v1(65,56.175) 76.1,56.175 76.275,56 ; 76.25,53.5 76.275,53.525
  Top Layer w1.5: J7.1 73.725,47.25 76.275,49.8 76.275,53.525 76.275,56 76.275,65.475 v1(73.125,68.625)
  Bottom Layer w0.4: v1(50.25,93.075) 48.525,93.075 C17.P 49.05,92 53.882,92 53.8,92.082 ; v1(50.575,82.825) 50.575,76.375 v1(50.5,76.3) 50.25,76.05 C21.P 49.2,75.1 53.882,75.1 ; v1(59.5,92.8) C7.P ; v1(59.8,75.675) 61.377,75.675 C3.P
  Bottom Layer w0.5: v1(50.25,93.075) 50.25,96.375 50.8,96.925 50.8,99.7 50.795,99.705 v1(50.677,99.705) ; v1(56.5,63.535) 58.86,61.175 61.477,61.175 62.65,60.002 C18.2 v1(64,59.475)
  Bottom Layer w1: C18.2 C23.2 v1(65,56.175)
  Bottom Layer w1.5: C21.P 48.25,73.25 50.3,71.2 59.7,71.2 61.75,73.25 C3.P 68.9,76.048 ; C17.P 48.25,89.45 50.2,87.5 59.318,87.5 61.75,89.932 C7.P 68.2,92.8 68.9,92.1 68.9,76.048 ; v1(73.125,68.625) 68.9,72.85 68.9,76.048
pads on no net: J2.MH J4.MH J5.MH J6.MH J7.MH J18.MH U1.4 U1.7 U1.8 U1.25 U2.4 U2.7 U2.8 U2.25 U3.8 U3.10 U3.22 U3.38

## Polygon pours and split planes (outlines as drawn)
GND on Bottom Layer "GND_L02_P000" (solid, remove dead copper, pour order 0): 80.2,41.8 80.2,105.5 24.25,105.5 24.25,41.8

## Other copper
Top Layer:
  pour cut-out: 80.725,102.45
  pour cut-out: 80.742,102.442
  pour cut-out: 80.425,102.45
Bottom Layer:
  pour cut-out: 27.3,105.7 27.3,106 23.95,106 23.95,102.3 24.1,102.3 24.1,102.675 cw(c27.125,102.675) 27.125,105.7
  pour cut-out: 24.1,44.85 23.8,44.85 23.8,41.5 27.5,41.5 27.5,41.65 27.125,41.65 cw(c27.125,44.675) 24.1,44.675
  pour cut-out: 77.2,41.65 77.2,41.35 80.55,41.35 80.55,45.05 80.4,45.05 80.4,44.675 cw(c77.375,44.675) 77.375,41.65
  pour cut-out: 80.425,102.45 80.725,102.45 80.725,105.8 77.025,105.8 77.025,105.65 77.4,105.65 cw(c77.4,102.625) 80.425,102.625

## Silkscreen, mask and mechanical layers (free items; w line width, h text height)
Top Overlay:
  lines w0.2: 51.5,44.1 51.5,43 59,43 ; 66.5,43.019 74.3,43.019 74.3,44
  text "IMU" at 44.225,100.375 h0.7 r90
  text "ToF10" at 42.5,94.35 h0.7 r90
  text "Motor R" at 75.2,92.675 h1 r90
  text "ToF9" at 42.5,89.575 h0.7 r90
  text "ToF8" at 42.5,84.9 h0.7 r90
  text "ToF7" at 42.5,79.7 h0.7 r90
  text "Motor L" at 75.4,76.175 h1 r90
  text "ToF6" at 42.5,74.825 h0.7 r90
  text "ToF5" at 42.5,69.775 h0.7 r90
  text "ToF4" at 42.5,64.925 h0.7 r90
  text "ToF3" at 42.5,59.85 h0.7 r90
  text "ToF2" at 42.5,54.75 h0.7 r90
  text "RysBoard v4.0" at 77,51.1 h1.5 r90
  text "ToF1" at 42.5,49.7 h0.7 r90
  text "Temp." at 42.5,44.425 h0.7 r90
  text "Battery" at 59.55,43.075 h1
  text "SW" at 46.125,42.975 h1
  text "GND" at 34.3,42.8 h0.7 r90
  text "IO" at 35.6,42.8 h0.7 r90
  text "SCL" at 36.8,42.8 h0.7 r90
  text "SDA" at 38.1,42.8 h0.7 r90
  text "VCC" at 39.4,42.8 h0.7 r90
Mechanical 2:
  lines w0.3: 80.2,41.8 24.257,41.8 24.257,105.5 80.257,105.5 80.257,41.8
Mechanical 11:
  lines w2: 23.1,44.7 ccw(c27.1,44.7) 27.1,40.7 ; 23.1,102.625 cw(c27.1,102.625) 27.1,106.625 ; 77.4,40.7 ccw(c77.4,44.7) 81.4,44.7 ; 77.4,106.65 cw(c77.4,102.65) 81.4,102.65
Mechanical 15:
  lines w2: 23.1,102.7 cw(c27.1,102.7) 27.1,106.7